# EAGLE board AVR-Control_V1.0 (EAGLE 6.6.0)
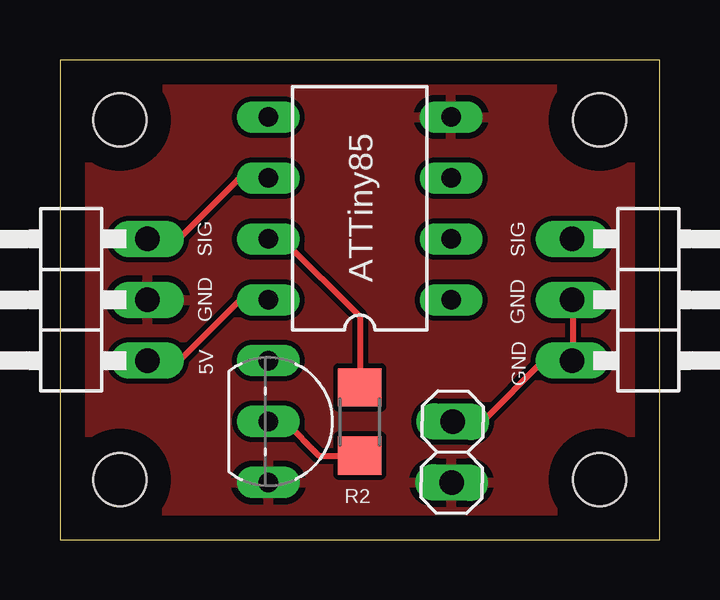
[diagram p0: board, top side]
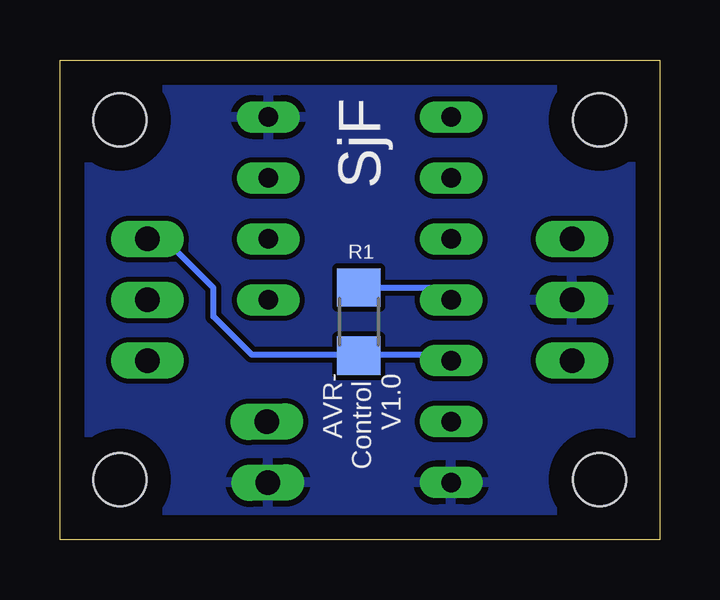
[diagram p1: board, bottom side, seen from below]

Size 25 x 20 mm. Coordinates in mm from the lower left corner, seen from the top.
Outline: 0,0 25,0 25,20 0,20 0,0
Copper layers (1*16): Top 0.035mm / dielectric 1.5mm / Bottom 0.035mm
Design rules "default": minimum track width 10mil, minimum drill 24mil, track to track 8mil, track to pad 8mil, pad to pad 8mil, via to via 8mil, smd to smd 8mil, copper to edge 40mil, drill to drill 8mil, minimum pad ring 10mil, minimum via ring 8mil, stop-mask expansion 4mil, vias tented up to drill 0mil, thermal gap 10mil
Holes 2.2 mm at 2.5,17.5 22.5,2.5 2.5,2.5 22.5,17.5

## Footprints (pad centres in the part's own frame; a part is rotated, then mirrored left to right if it is on the bottom)
DIL08 = drill 0.813 long: 1 -3.81,-3.81; 2 -1.27,-3.81; 3 1.27,-3.81; 4 3.81,-3.81; 5 3.81,3.81; 6 1.27,3.81; 7 -1.27,3.81; 8 -3.81,3.81
1X03/90 = drill 1.016 long: 1 -2.54,-3.81; 2 0,-3.81; 3 2.54,-3.81
1X02 = drill 1.016 long: 1 -1.27,0; 2 1.27,0
TO92-EBC = drill 0.813 long: B 0,-1.27; C -2.54,-1.27; E 2.54,-1.27
R1206 = smd 1.6 x 1.803: 1 -1.422,0; 2 1.422,0

## Placement (x,y rotation side)
IC1  TINY10P  [DIL08]  12.5,13.81 90 top
JP1  IN  [1X03/90]  -0.16,10 90 top
JP2  OUT  [1X03/90]  25.16,10 270 top
JP3  GND OUT  [1X02]  16.35,3.65 269.1 top
Q1  BC548  [TO92-EBC]  9.96,4.92 270 top
R1  10k  [R1206]  12.54,9.09 90 bottom
R2  2k2  [R1206]  12.5,4.92 90 top

## Library data of the parts
IC1 = atmel; OC_FARNELL: unknown; OC_NEWARK: unknown
JP1-JP3 = pinhead
Q1 = transistor-npn
R1 R2 = eagle-ltspice; SPICEMODEL: NONE; SPICEPREFIX: R

## Nets
ATTINY_OUT: IC1.7 R2.2
BASE: Q1.B R2.1
GND: IC1.4 JP1.2 JP3.2 Q1.E
GND_OUTPUT: JP2.2 JP2.3 JP3.1
SIG_IN: IC1.6 JP1.3
SIG_OUT: JP2.1 Q1.C R1.1
VCC [GND]: IC1.8 JP1.1 R1.2

## Tracks (layer width: path | path; a pad name or v marks a point on that pad's centre or on a via)
ATTINY_OUT
  Top 0.254: R2.2 12.5,9.3 9.3,12.5 8.7,12.5 IC1.7
BASE
  Top 0.254: R2.1 10.8,3.5 9.4,4.9 8.7,4.9 Q1.B
GND
  pour Top: 0,0 0,20 25.4,20 25.4,0
  pour Bottom: 0,0 0,20 25.4,20 25.4,0
GND_OUTPUT
  Top 0.254: JP3.1 16.4,5 17.7,5 20.1,7.4 21.3,7.4 JP2.3 21.4,7.5 21.4,10 JP2.2
SIG_IN
  Top 0.254: IC1.6 8.6,15 7.4,15 5,12.6 3.7,12.6 JP1.3
SIG_OUT
  Bottom 0.254: Q1.C 8.7,7.5 8.9,7.7 12.5,7.7 R1.1 12.6,7.7 17,7.7 18.6,9.3 18.6,10.5 20.6,12.5 21.3,12.5 JP2.1
VCC
  Top 0.254: IC1.8 7.5,10 5,7.5 3.7,7.5 JP1.1
  Bottom 0.254: R1.2 12.5,10.5 9.2,10.5 IC1.8

## Text on the board
tNames: ATTiny85 | SIG | SIG | GND | GND | 5V | GND
bNames: SjF | AVR- / Control / V1.0